# Altium PCB BasicSAMD21.PcbDoc
Units mm, origin at the board's own origin, x right, y up, seen from the top; angles counter-clockwise.
Board outline 39.5 x 45 mm, 2 copper layers (Top Layer, Bottom Layer); 35 components, 50 nets, 163 pads, 40 vias.
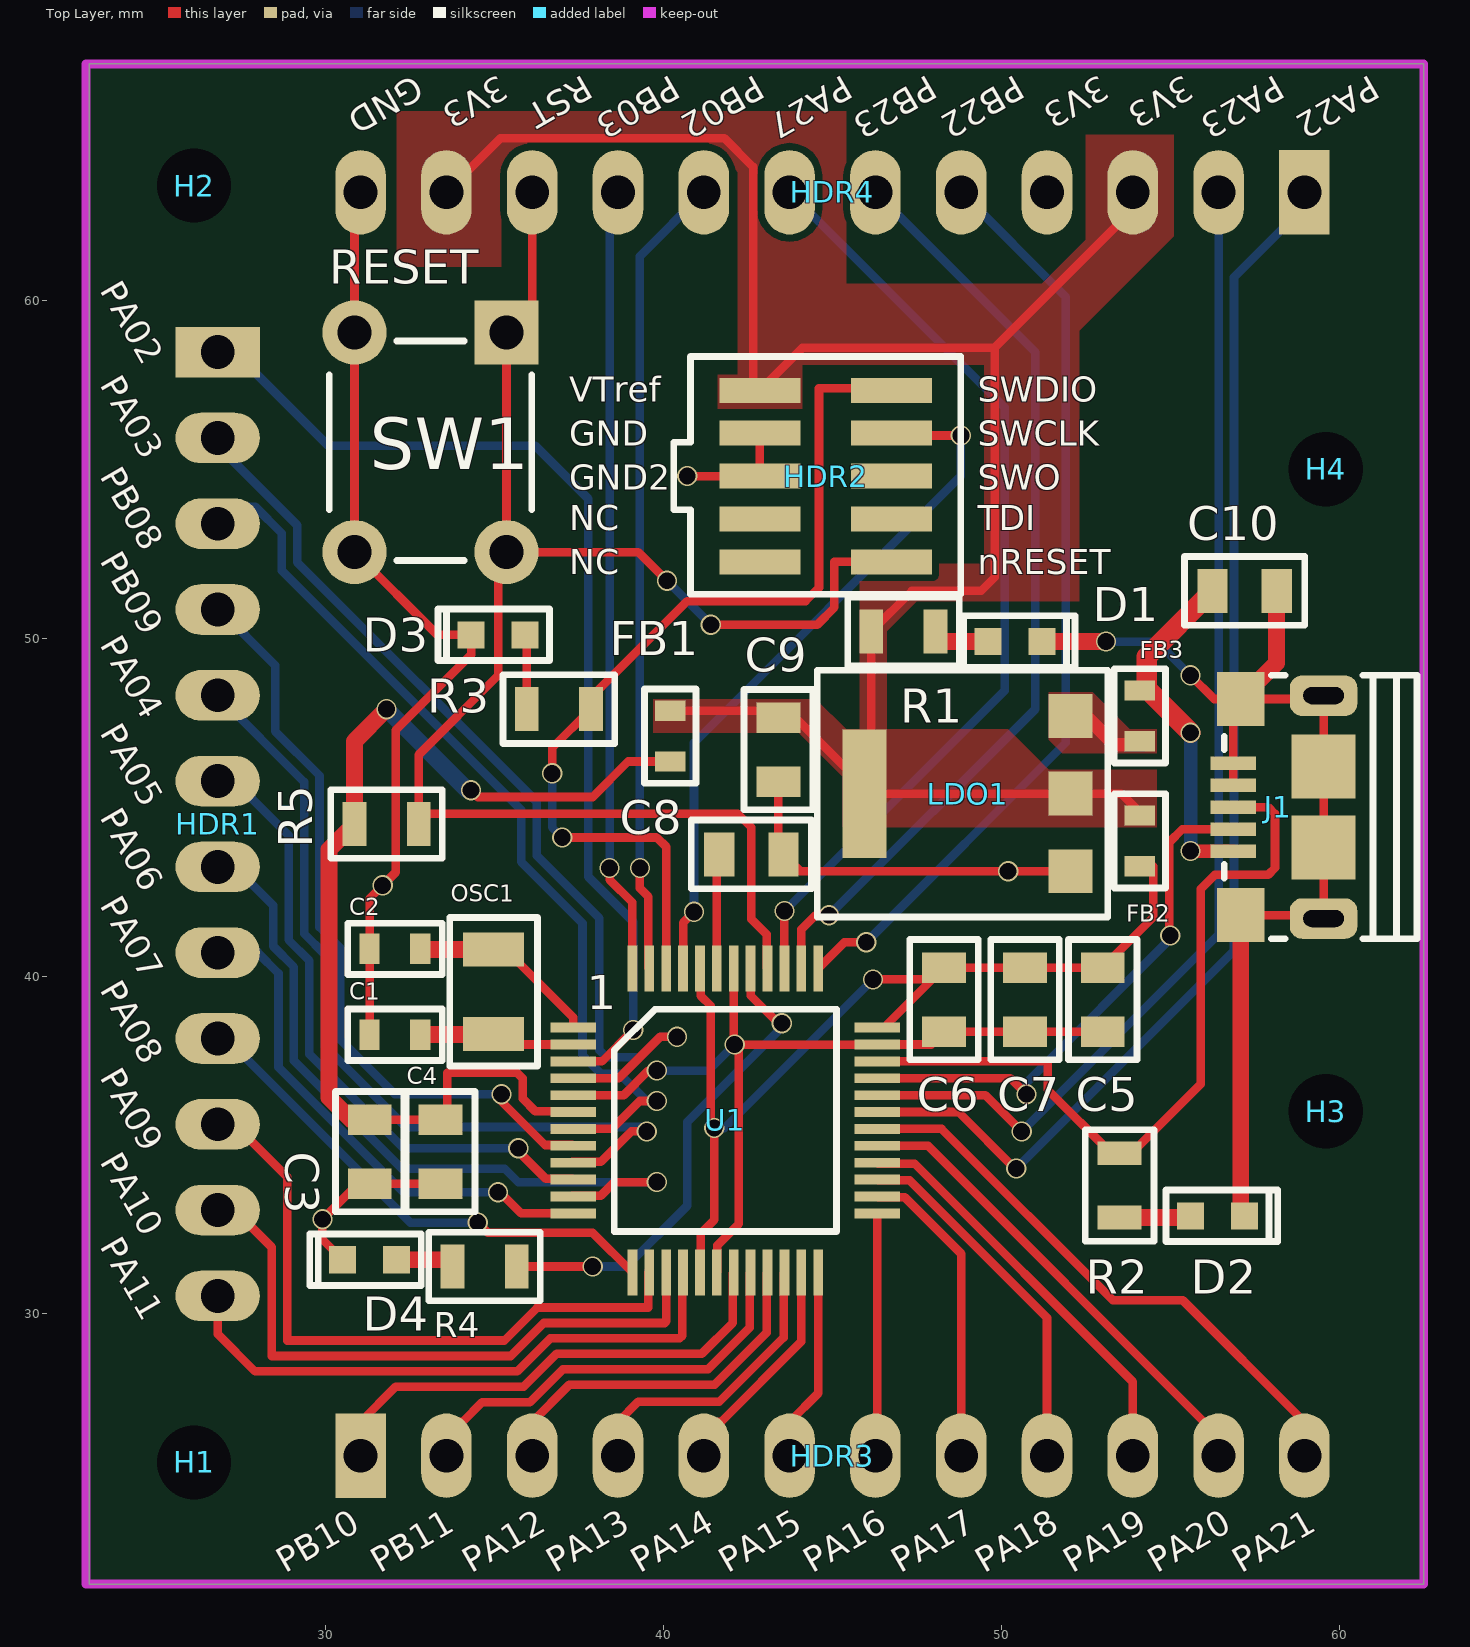
[diagram p0: Top Layer view]
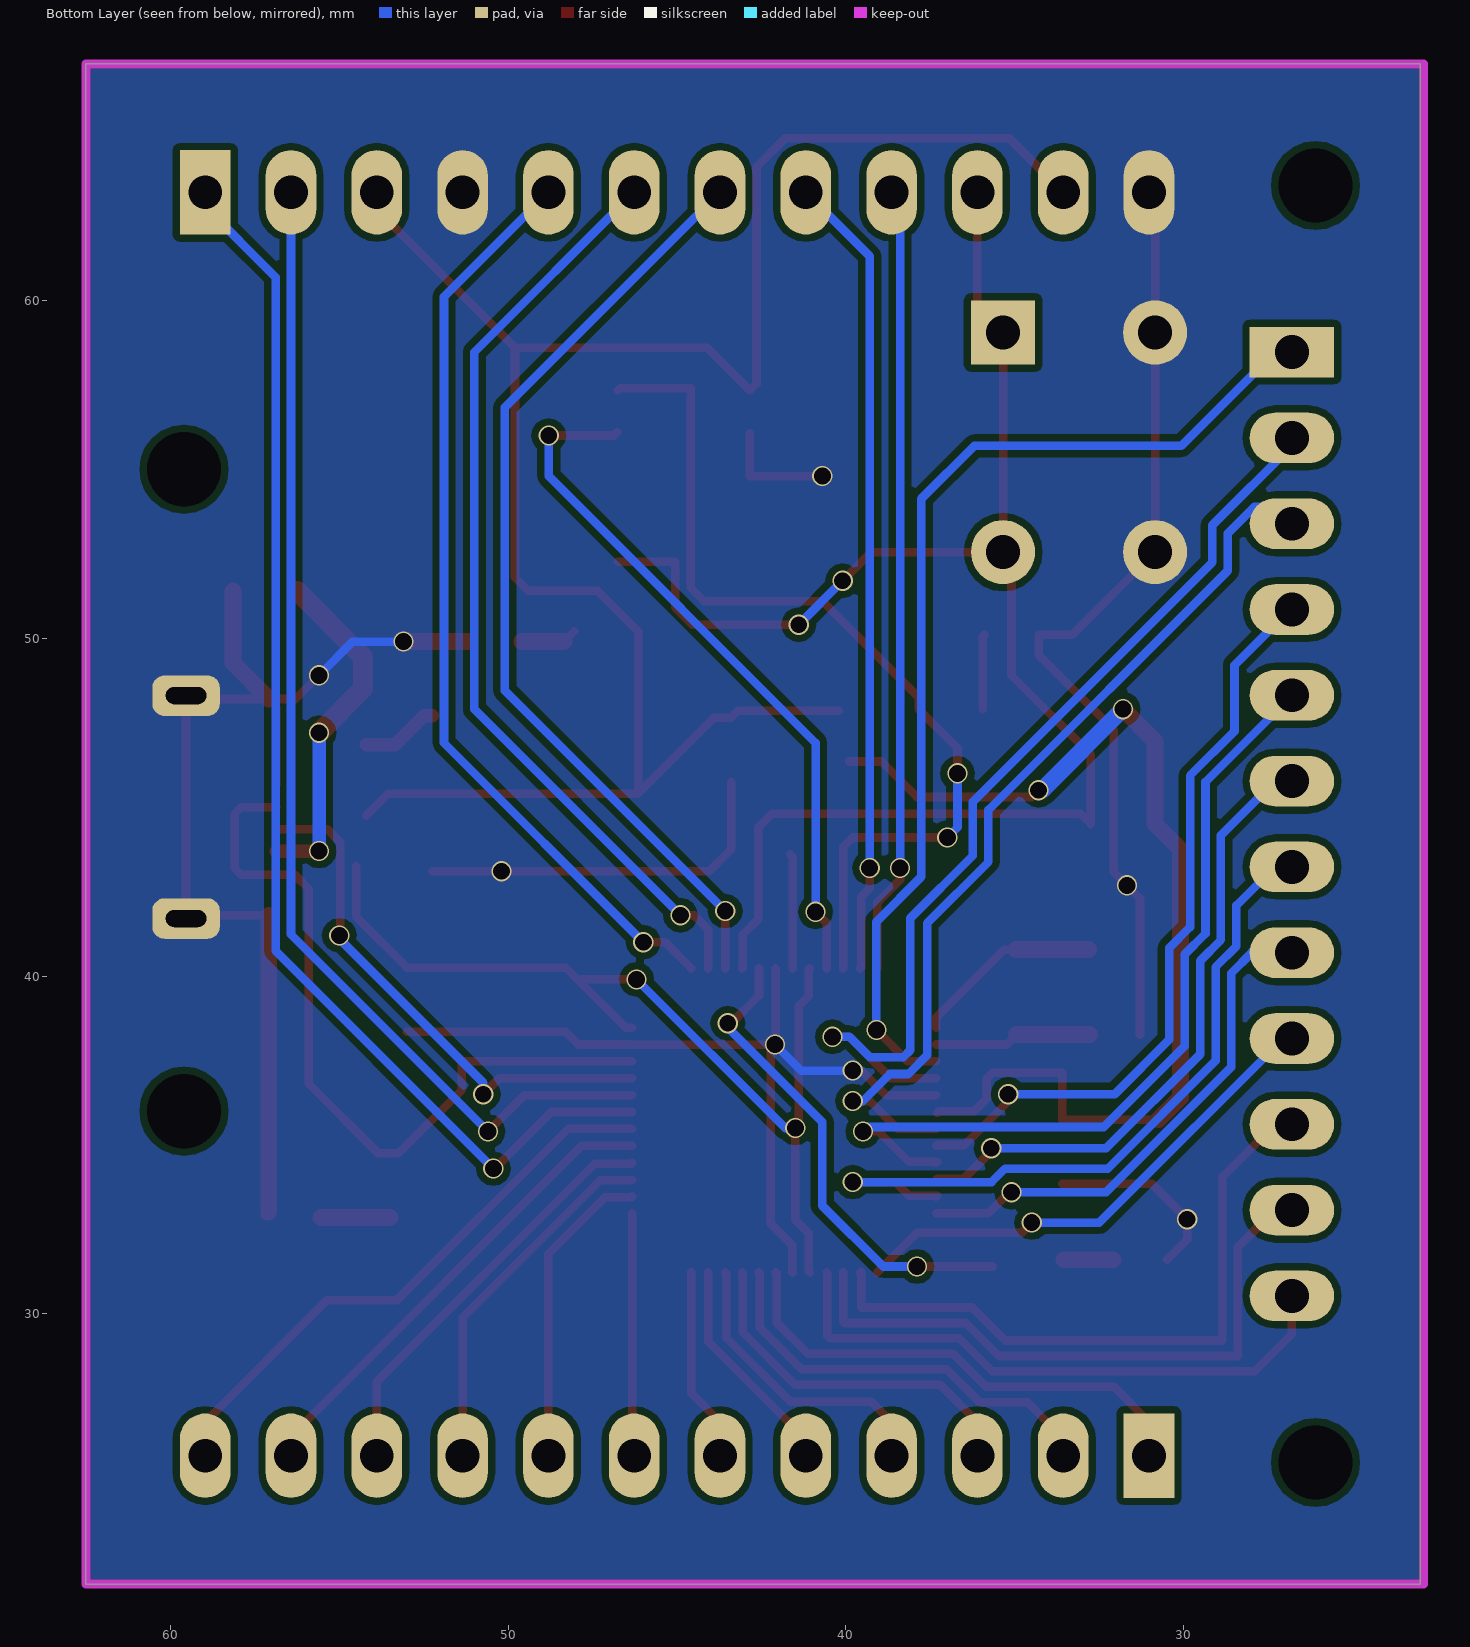
[diagram p1: Bottom Layer view, seen from below]
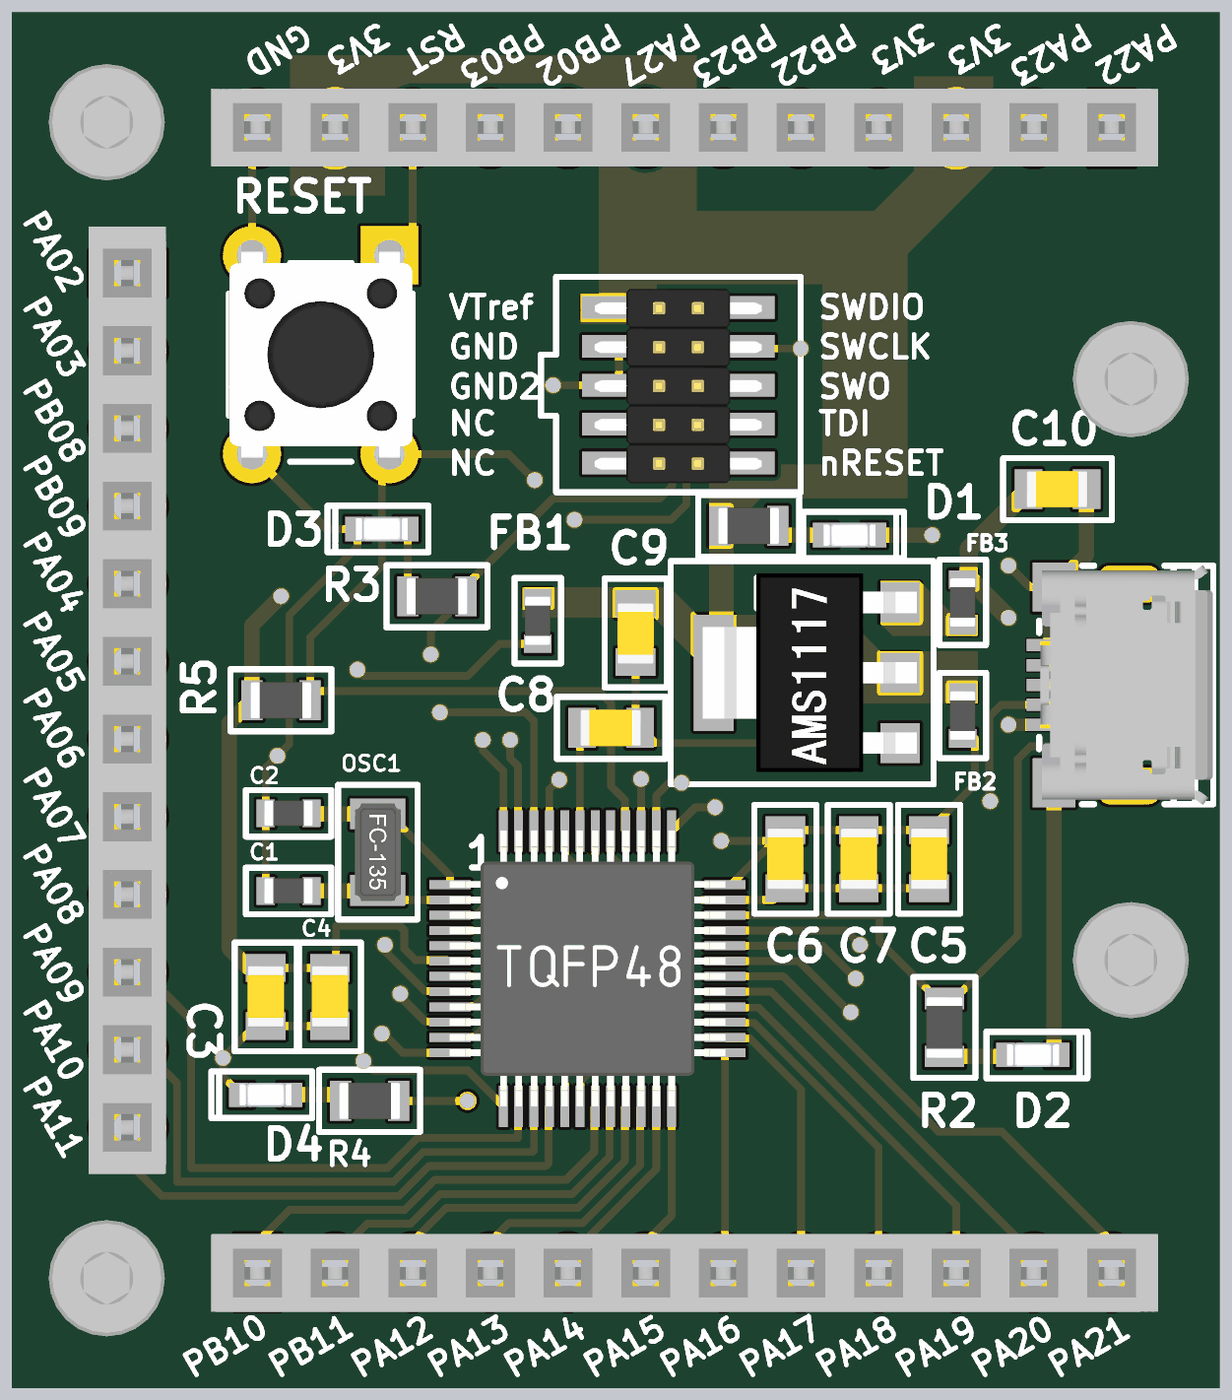
[diagram p2: 3D render of the assembled board from above, using the file's embedded part models]

## Layer stack, top to bottom
Top Solder: solder mask 0.0102, Solder Resist, Dk 3.5
Top Layer: signal copper 0.0356
Dielectric 1: dielectric 0.32, FR-4, Dk 4.8
Bottom Layer: signal copper 0.0356
Bottom Solder: solder mask 0.0102, Solder Resist, Dk 3.5

## Board outline
23,22 62.5,22 62.5,67 23,67

## Design rules (kind name [scope] priority, off if disabled: settings)
Clearance [Not (OnLayer('Keep-Out Layer')) vs Not (OnLayer('Keep-Out Layer'))] p1: gap=0.203 ignorepadtopadclearanceinfootprint=TRUE
PolygonConnect [All] p1: connectstyle=Direct reliefconductorwidth=0.254 reliefentries=4 polygonreliefangle="90 Angle" airgapwidth=0.254
RoutingVias [All] p1: holewidth=0.6 width=0.5 viastyle="Through Hole" minholewidth=0.5 minwidth=0.5 maxholewidth=1 maxwidth=1.27
SolderMaskExpansion [All] p1: expansion=0.102
Width [All] p1: maxlimit=1 minlimit=0.1 preferedwidth=0.2
30 further rules are at their usual default settings.

## Components (designator, comment, footprint, x,y, rotation, side; value= is the part's Value field where it differs from the comment)
C1 "15pF_0603" C0603 32.047,38.263 r180 top
C2 "15pF_0603" C0603 32.047,40.803 r180 top
C3 "10uF/16V" C0805 31.3,34.8 r90 top
C4 "100nF" C0805 33.4,34.8 r90 top
C5 "100nF" C0805 53,39.3 r90 top
C6 "10uF/16V" C0805 48.3,39.3 r90 top
C7 "100nF" C0805 50.7,39.3 r90 top
C8 "1uF/25V" C0805 42.6,43.6 r180 top
C9 "10uF/16V" C0805 43.4,46.7 r270 top
C10 "10uF/16V" C0805 57.2,51.4 r180 top
D1 "Orange" LED_0603 50.4,49.9 r180 top
D2 "Orange" LED_0603 56.4,32.9 r180 top
D3 "Orange" LED_0603 35.1,50.1 r0 top
D4 "Orange" LED_0603 31.3,31.6 r0 top
FB1 "FerriteBead0R800mA_0603" C0603 40.2,47.1 r270 top
FB2 "FerriteBead0R800mA_0603" C0603 54.1,44 r270 top
FB3 "FerriteBead0R800mA_0603" C0603 54.1,47.7 r270 top
H1 "M2Hole" M2Hole 26.1,25.6 r0 top
H2 "M2Hole" M2Hole 26.1,63.4 r0 top
H3 "M2Hole" M2Hole 59.6,36 r0 top
H4 "M2Hole" M2Hole 59.6,55 r0 top
HDR1 "2.54HDR_12POS" DIP12 26.8,44.5 r0 top
HDR2 "JTAG10Pin" JTAG10 44.8,54.8 r0 top
HDR3 "2.54HDR_12POS" DIP12 45,25.8 r90 top
HDR4 "2.54HDR_12POS" DIP12 45,63.2 r270 top
J1 "10118193-0001LF" 10118193 58.2,45 r90 top
LDO1 "LDO_AMS11173.3_SOT-223" SOT223 49,45.4 r90 top
OSC1 "FC-135_32KHZ" FC-135 34.968,39.533 r270 top
R1 "1k R" R0805 47.1,50.2 r0 top
R2 "1k R" R0805 53.5,33.8 r270 top
R3 "1k R" R0805 36.9,47.9 r180 top
R4 "1k R" R0805 34.7,31.4 r180 top
R5 "1k R" R0805 31.8,44.5 r0 top
SW1 "1825910-6" 1825910-6 33.1,55.8 r0 top
U1 "ATSAMD21G18" TQFP48 41.826,35.723 r0 top

## Footprints (in the part's own frame and the unit in brackets; to place one, negate y for a bottom-side part, rotate by r counter-clockwise, add the part's x,y. Pads: shape width x height; smd on the part's side, far side on the other; paste and mask are expansions set on the pad)
1825910-6 [mm]
  rect 1.9x1.9 hole 1: 1(2.25,3.25)
  round 1.9 hole 1: 2(2.25,-3.25) 3(-2.25,3.25) 4(-2.25,-3.25)
  silkscreen extent -3,-3.5 3,3, body extent -3,-3.9 2.99,3.9, height 5
10118193 [mm]
  rect 0.4x1.35 smd mask+0.05: 1(-1.3,1.338) 2(-0.65,1.338) 3(0,1.338) 4(0.65,1.338) 5(1.3,1.338)
  rect 1.6x1.4 smd: 6(-3.2,1.112) 7(3.2,1.112)
  rrect60% 1.2x2 hole 0.5 slot 1.2 at 90 deg: 8(-3.3,-1.338) 9(3.3,-1.338)
  rect 1.9x1.9 smd: 10(-1.2,-1.338) 11(1.2,-1.338)
  silkscreen extent -3.9,-4.1 3.9,1.6, body extent -3.93,-4.1 3.93,1.56, height 2.81
C0603 [mm]
  rect 0.6x0.9 smd: 1(-0.75,0) 2(0.75,0)
  silkscreen extent -1.4,-0.76 1.4,0.76, body extent -0.8,-0.43 0.8,0.42, height 0.81
C0805 [mm]
  rect 0.9x1.3 smd: 1(-0.95,0) 2(0.95,0)
  silkscreen extent -1.78,-1.02 1.78,1.02, body extent -0.98,-0.6 1.02,0.6, height 0.96
DIP12 [mm]
  rect 2.5x1.5 hole 1: 1(0,13.97)
  oval 2.5x1.5 hole 1: 2(0,11.43) 3(0,8.89) 4(0,6.35) 5(0,3.81) 6(0,1.27) 7(0,-1.27) 8(0,-3.81) 9(0,-6.35) 10(0,-8.89) 11(0,-11.43) 12(0,-13.97)
  body extent -1.3,-15.49 1.24,15.49, height 8.51
FC-135 [mm]
  rect 1x1.8 smd: 1(-1.25,0) 2(1.25,0)
  silkscreen extent -2.2,-1.3 2.2,1.3, body extent -1.6,-0.75 1.6,0.75, height 0.8
JTAG10 [mm]
  rect 2.4x0.74 smd: 1(-1.95,2.54) 2(-1.95,1.27) 3(-1.95,0) 4(-1.95,-1.27) 5(-1.95,-2.54) 6(1.95,-2.54) 7(1.95,-1.27) 8(1.95,0) 9(1.95,1.27) 10(1.95,2.54)
  silkscreen extent -4.5,-3.5 4,3.54, body extent -2.75,-3.2 2.75,3.15, height 4.69
LED_0603 [mm]
  rect 0.8x0.8 smd: 1(-0.8,0) 2(0.8,0)
  silkscreen extent -1.78,-0.76 1.52,0.76, body extent -0.85,-0.4 0.85,0.4, height 0.66
M2Hole [mil]
  round 60 hole 86.61 unplated: ""(0,0)
  body extent -75,-75 75,75, height 79
R0805 [mm]
  rect 0.7x1.3 smd: 1(-0.95,0) 2(0.95,0)
  silkscreen extent -1.65,-1.02 1.65,1.02, body extent -1,-0.6 1,0.6, height 0.71
SOT223 [mm]
  rect 1.3x1.3 smd: 1(-2.3,-3.05) 2(0,-3.05) 3(2.3,-3.05)
  rect 3.8x1.3 smd: 2(0,3.05)
  silkscreen extent -3.65,-4.15 3.65,4.45, body extent -3.25,-3.6 3.25,3.4, height 1.87
TQFP48 [mm]
  rect 1.35x0.29 smd: 1(-4.5,2.75) 2(-4.5,2.25) 3(-4.5,1.75) 4(-4.5,1.25) 5(-4.5,0.75) 6(-4.5,0.25) 7(-4.5,-0.25) 8(-4.5,-0.75) 9(-4.5,-1.25) 10(-4.5,-1.75) 11(-4.5,-2.25) 12(-4.5,-2.75) 25(4.5,-2.75) 26(4.5,-2.25) 27(4.5,-1.75) 28(4.5,-1.25) 29(4.5,-0.75) 30(4.5,-0.25) 31(4.5,0.25) 32(4.5,0.75) 33(4.5,1.25) 34(4.5,1.75) 35(4.5,2.25) 36(4.5,2.75)
  rect 0.29x1.35 smd: 13(-2.75,-4.5) 14(-2.25,-4.5) 15(-1.75,-4.5) 16(-1.25,-4.5) 17(-0.75,-4.5) 18(-0.25,-4.5) 19(0.25,-4.5) 20(0.75,-4.5) 21(1.25,-4.5) 22(1.75,-4.5) 23(2.25,-4.5) 24(2.75,-4.5) 37(2.75,4.5) 38(2.25,4.5) 39(1.75,4.5) 40(1.25,4.5) 41(0.75,4.5) 42(0.25,4.5) 43(-0.25,4.5) 44(-0.75,4.5) 45(-1.25,4.5) 46(-1.75,4.5) 47(-2.25,4.5) 48(-2.75,4.5)
  silkscreen extent -3.29,-3.29 3.29,3.29, body extent -4.51,-4.51 4.51,4.51, height 1.1

## Part data
C3 C6 C9 C10: library part C2012X5R1C106M125AC, "CAP CER 10UF 16V X5R 0805", Manufacturer="TDK Corporation", Operating Temperature="-55°C ~ 85°C", Package / Case="0805 (2012 Metric)", Ratings=-, Supplier Part Number 1=445-4115-1-ND, Temperature Coefficient=X5R, Tolerance=±20%, Voltage - Rated=16V, Applications="General Purpose", Category=Capacitors, ComponentLink1Description=https://product.tdk.com/info/en/catalog/datasheets/mlcc_commercial_general_en.pdf, ComponentLink1URL=https://product.tdk.com/info/en/catalog/datasheets/mlcc_commercial_general_en.pdf, Failure Rate=-, Features="Low ESL", Height - Seated (Max)=-, Lead Spacing=-, Lead Style=-, Manufacturer Part Number=C2012X5R1C106M125AC, Mounting Type="Surface Mount, MLCC", Packaging="Cut Tape (CT)", Part Status=Obsolete, Pricing 1="1=0 (USD)", RoHS="RoHS Compliant", Size / Dimension="0.079\" L x 0.049\" W (2.00mm x 1.25mm)", Stock 1=0, Supplier 1=Digi-Key, Thickness (Max)="0.057\" (1.45mm)"
C4 C5 C7: library part C2012X7R1H104K085AA, "CAP CER 0.1UF 50V X7R 0805", Manufacturer="TDK Corporation", Operating Temperature="-55°C ~ 125°C", Package / Case="0805 (2012 Metric)", Ratings=-, Supplier Part Number 1=445-7534-1-ND, Temperature Coefficient=X7R, Tolerance=±10%, Voltage - Rated=50V, Applications="General Purpose", Category=Capacitors, ComponentLink1Description=https://product.tdk.com/info/en/catalog/datasheets/mlcc_commercial_general_en.pdf, ComponentLink1URL=https://product.tdk.com/info/en/catalog/datasheets/mlcc_commercial_general_en.pdf, Failure Rate=-, Features="Low ESL", Height - Seated (Max)=-, Lead Spacing=-, Lead Style=-, Manufacturer Part Number=C2012X7R1H104K085AA, Mounting Type="Surface Mount, MLCC", Notification="Current market demand for these product types have resulted in fluctuating and extending lead times. Lead times may differ.", Packaging="Cut Tape (CT)", Part Status="Not For New Designs", Pricing 1="1=0.12, 10=0.082, 100=0.0385, 500=0.027, 1000=0.02236 (USD)", RoHS="RoHS Compliant", Size / Dimension="0.079\" L x 0.049\" W (2.00mm x 1.25mm)", Stock 1=101021, Supplier 1=Digi-Key, Thickness (Max)="0.037\" (0.95mm)"
C8: library part C2012X5R1E105K125AA, "CAP CER 1UF 25V X5R 0805", Manufacturer="TDK Corporation", Operating Temperature="-55°C ~ 85°C", Package / Case="0805 (2012 Metric)", Ratings=-, Supplier Part Number 1=445-1419-1-ND, Temperature Coefficient=X5R, Tolerance=±10%, Voltage - Rated=25V, Applications="General Purpose", Category=Capacitors, ComponentLink1Description=https://product.tdk.com/info/en/catalog/datasheets/mlcc_commercial_general_en.pdf, ComponentLink1URL=https://product.tdk.com/info/en/catalog/datasheets/mlcc_commercial_general_en.pdf, Failure Rate=-, Features="Low ESL", Height - Seated (Max)=-, Lead Spacing=-, Lead Style=-, Manufacturer Part Number=C2012X5R1E105K125AA, Mounting Type="Surface Mount, MLCC", Notification="Current market demand for these product types have resulted in fluctuating and extending lead times. Lead times may differ.", Packaging="Cut Tape (CT)", Part Status="Not For New Designs", Pricing 1="1=0.18, 10=0.129, 100=0.0605, 500=0.04244, 1000=0.03514 (USD)", RoHS="RoHS Compliant", Size / Dimension="0.079\" L x 0.049\" W (2.00mm x 1.25mm)", Stock 1=774565, Supplier 1=Digi-Key, Thickness (Max)="0.057\" (1.45mm)"
D1 D2 D3 D4: library part "LO L29K-H2K1-24-Z", "LED ORANGE DIFFUSED 0603 SMD", Current - Test=2mA, Lens Color=White, Manufacturer="OSRAM Opto Semiconductors Inc.", Millicandela Rating=6.3mcd, Package / Case="0603 (1608 Metric)", Supplier Device Package=0603, Supplier Part Number 1=475-2740-1-ND, Voltage - Forward (Vf) (Typ)=1.8V, Category=Optoelectronics, Color=Orange, ComponentLink1Description=https://dammedia.osram.info/media/resource/hires/osram-dam-2493882/LO%20L29K.pdf, ComponentLink1URL=https://dammedia.osram.info/media/resource/hires/osram-dam-2493882/LO%20L29K.pdf, Features=-, Height (Max)=0.65mm, Lens Style/Size="Rectangle with Flat Top, 1.30mm x 0.80mm", Lens Transparency=Diffused, Manufacturer Part Number="LO L29K-H2K1-24-Z", Mounting Type="Surface Mount", Packaging="Cut Tape (CT)", Part Status=Active, Pricing 1="1=0.51, 10=0.359, 25=0.3116, 100=0.2396, 250=0.19468, 500=0.14376, 1000=0.1198, 2500=0.10782 (USD)", RoHS="RoHS Compliant", Size / Dimension="1.70mm L x 0.80mm W", Stock 1=8500, Supplier 1=Digi-Key, Viewing Angle=160°, Wavelength - Dominant=606nm, Wavelength - Peak=610nm
HDR2: library part JTAG_10Pin
J1: "CONN USB MICRO B RECPT SMT R/A", Current Rating="1.8A per Contact", Insulation Color=Black, Manufacturer="Amphenol FCI", Material Flammability Rating="UL94 V-0", Operating Temperature="-30°C ~ 80°C", Supplier Part Number 1=609-4616-1-ND, Voltage - Rated=100VAC, Category="Connectors, Interconnects", ComponentLink1Description=http://cdn.amphenol-icc.com/media/wysiwyg/files/drawing/10118193.pdf, ComponentLink1URL=http://cdn.amphenol-icc.com/media/wysiwyg/files/drawing/10118193.pdf, Connector Type="USB - micro B", Contact Finish=Gold, Features="Solder Retention", Gender=Receptacle, Ingress Protection=-, Manufacturer Part Number=10118193-0001LF, Mating Cycles=10000, Mounting Feature=Horizontal, Mounting Type="Surface Mount, Right Angle; Through Hole", Number of Contacts=5, Packaging="Cut Tape (CT)", Part Status=Active, Pricing 1="1=0.46, 10=0.437, 25=0.3744, 50=0.318, 100=0.3056, 250=0.27444, 500=0.26196 (USD)", RoHS="RoHS Compliant", Shell/Shielding Material="Steel, Stainless", Shielding=Shielded, Specifications="USB 2.0", Stock 1=104127, Supplier 1=Digi-Key, Termination=Solder
OSC1: library part FC-135R32.7680KA-A3, "32.768kHz ±20ppm Crystal 12.5pF 50 kOhm -40°C ~ 85°C  Surface Mount 2-SMD, No Lead (DFN, LCC)", ESR (Equivalent Series Resistance)="50 kOhm", Frequency=32.768kHz, Frequency Stability=-, Frequency Tolerance=±20ppm, Load Capacitance=12.5pF, Manufacturer=Epson, Operating Mode=Fundamental, Operating Temperature="-40°C ~ 85°C", Package / Case="2-SMD, No Lead (DFN, LCC)", Category="Crystals and Oscillators", Family=Crystals, Height="0.035\" (0.90mm)", Manufacturer Part Number=FC-135R32.7680KA-A3, Mounting Type="Surface Mount", Packaging="Cut Tape (CT)", Pricing 1="1=0.59, 10=0.495, 50=0.4456, 100=0.396 (USD)", Ratings=-, Series=FC-135R, Size / Dimension="0.126\" L x 0.061\" W (3.20mm x 1.50mm)", Stock 1=2024, Supplier 1=Digi-Key, Type="kHz Crystal (Tuning Fork)"
R1 R2 R3 R4 R5: library part RC0805FR-071KL, "RES SMD 1K OHM 1% 1/8W 0805", Manufacturer=Yageo, Operating Temperature="-55°C ~ 155°C", Package / Case="0805 (2012 Metric)", Power (Watts)="0.125W, 1/8W", Supplier Device Package=0805, Supplier Part Number 1=311-1.00KCRCT-ND, Temperature Coefficient=±100ppm/°C, Tolerance=±1%, Category=Resistors, ComponentLink1Description=http://www.yageo.com/documents/recent/PYu-RC_Group_51_RoHS_L_8.pdf, ComponentLink1URL=http://www.yageo.com/documents/recent/PYu-RC_Group_51_RoHS_L_8.pdf, Composition="Thick Film", Failure Rate=-, Features="Moisture Resistant", Height - Seated (Max)="0.024\" (0.60mm)", Manufacturer Part Number=RC0805FR-071KL, Packaging="Cut Tape (CT)", Part Status=Active, Pricing 1="1=0.1, 10=0.022, 100=0.0088, 1000=0.00396, 2500=0.00344 (USD)", RoHS="RoHS Compliant", Size / Dimension="0.079\" L x 0.049\" W (2.00mm x 1.25mm)", Stock 1=8527092, Supplier 1=Digi-Key
SW1: "SWITCH TACTILE SPST-NO 0.05A 24V", Contact Rating @ Voltage="0.05A @ 24VDC", Illumination Type, Color=-, Manufacturer="TE Connectivity ALCOSWITCH Switches", Operating Force=160gf, Operating Temperature="-35°C ~ 85°C", Supplier Part Number 1=450-1650-ND, Actuator Height off PCB, Vertical=5.00mm, Actuator Length, Right Angle=-, Actuator Material="Polybutylene Terephthalate (PBT)", Actuator Orientation="Top Actuated", Actuator Type=Standard, Category=Switches, Circuit=SPST-NO, ComponentLink1Description=http://www.te.com/commerce/DocumentDelivery/DDEController?Action=srchrtrv&DocNm=1825910&DocType=Customer+Drawing&DocLang=English, ComponentLink1URL=http://www.te.com/commerce/DocumentDelivery/DDEController?Action=srchrtrv&DocNm=1825910&DocType=Customer+Drawing&DocLang=English, Features=-, Illumination=Non-Illuminated, Illumination Voltage (Nominal)=-, Ingress Protection=-, Manufacturer Part Number=1825910-6, Mechanical Life="100,000 Cycles", Mounting Type="Through Hole", Outline="6.00mm x 6.00mm", Packaging=Bulk, Part Status=Active, Pricing 1="1=0.1, 10=0.091, 25=0.0876, 50=0.0844, 100=0.0798, 250=0.07508, 500=0.07196, 1000=0.05475, 5000=0.04536 (USD)", RoHS="RoHS Compliant", Stock 1=88203, Supplier 1=Digi-Key, Switch Function=Off-Mom, Switch Travel=0.25mm, Termination Style="PC Pin"
U1: library part ATSAMD21G18A-AUT, "IC MCU 32BIT 256KB FLASH 48TQFP", Manufacturer=Microchip, Manufacturer Part Number=ATSAMD21G18A-AUT, Pricing 1="1=3.22, 25=2.9252, 100=2.6574 (USD)", Stock 1=16813, Supplier 1=Digi-Key

## Via types
v1: diameter 0.6, hole 0.5, Top Layer to Bottom Layer, 40 vias

## Nets (pads, with @x,y where several pads share a name; then routed paths per layer and width w, separated by ;. In a path a pad name is that pad's centre, name@x,y a point inside that pad or via, vN(x,y) a via of type N, cw(c..) or ccw(c..) an arc to the next point about the centre after c; other vN are vias at no path point)
GND: C1.2 C2.2 C3.1 C4.1 C5.1 C6.1 C7.1 C8.1 C9.2 C10.1 D1.1 D2.1 D3.1 D4.1 HDR2.2 HDR2.3 HDR4.4 HDR4.12 J1.4 J1.5 J1.6 J1.7 J1.8 J1.9 J1.10 J1.11 LDO1.1 SW1.3 SW1.4 U1.5 U1.18 U1.35 U1.42 | length 107.4
  Top Layer w0.254: v1(29.9,32.8) 30.95,33.85 C3.1 C4.1@33.6,33.85 ; v1@30.05,32.75 29.9,32.6 29.9,32.2 D4.1 ; HDR4.12 30.85,63.02 SW1.3 SW1.4 33.3,50.1 D3.1 34.3,49.509 32.07,47.279 32.07,43.07 31.297,42.297 C2.2 C1.2 ; U1.5 38.82,36.473 39.547,37.2 v1(39.8,37.2) ; v1(40.7,54.8) HDR2.3 HDR2.2 ; U1.18 41.594,31.241 41.594,32.028 42.23,32.664 42.23,37.846 v1(42.103,37.973) ; U1.42 42.076,38 v1(42.103,37.973) ; C9.2 43.4,43.75 C8.1 44.05,43.1 LDO1.1@52.25,43.1 ; C5.1 C7.1 C6.1 47.923,37.973 U1.35 46.323,37.97 42.106,37.97 v1(42.103,37.973) ; v1(55.6,48.9) 56.3,48.2 J1.7 ; J1.4 J1.5 56.862,47.975 J1.7 ; D2.1@57.088,33.012 D2.1 ; J1.6 59.437,41.8 59.538,41.9 J1.10 J1.11 J1.9 59.438,48.2 J1.7
  Top Layer w0.5: D1.1 v1(53.1,49.9) ; D2.1@57.088,33.012 J1.6 ; J1.7 58.15,49.262 C10.1
  Bottom Layer w0.254: v1(39.8,37.2) 41.33,37.2 v1(42.103,37.973) ; v1(53.1,49.9) 54.6,49.9 v1(55.6,48.9)
  other v1: 31.683,42.683 50.2,43.1
NetC1_1: C1.1 OSC1.2 U1.2 | length 4.6
  Top Layer w0.254: OSC1.2@34.948,38.263 35.238,37.973 U1.2
  Top Layer w0.5: C1.1 OSC1.2@34.948,38.263
NetC2_1: C2.1 OSC1.1 U1.1 | length 5.6
  Top Layer w0.254: OSC1.1 35.317,40.783 37.326,38.774 U1.1
  Top Layer w0.5: C2.1@32.817,40.783 OSC1.1
NetC10_2: C10.2 FB3.1 J1.1 | length 10.4
  Top Layer w0.4: v1(55.6,43.7) J1.1
  Top Layer w0.6: v1(55.6,47.2) 54.3,48.5 54.3,49.45 C10.2
  Bottom Layer w0.254: v1(55.6,43.7) 55.7,43.8 v1@55.6,43.9
  Bottom Layer w0.4: v1@55.6,43.9 v1(55.6,47.2)
NetD1_2: D1.2 R1.2 | length 1.7
  Top Layer w0.254: R1.2 R1.2@48.35,49.9
  Top Layer w0.5: R1.2@48.35,49.9 D1.2
NetD2_2: D2.2 R2.2 | length 2
  Top Layer w0.5: R2.2 D2.2@55.55,32.85
NetD3_2: D3.2 R3.2 | length 2.2
  Top Layer w0.254: D3.2 35.95,50.05 R3.2
NetD4_2: D4.2 R4.2 | length 1.4
  Top Layer w0.5: D4.2 R4.2@33.55,31.6
NetFB3_2: FB3.2 LDO1.3 | length 2.3
  Top Layer w0.4: LDO1.3@52.25,47.7 52.5,47.7 53.35,46.85 FB3.2@54.2,46.85
NetHDR2_9: HDR2.9 U1.45 | length 21.2
  Top Layer w0.254: U1.45 40.576,41.576 v1(40.9,41.9) ; HDR2.9@46.78,56.1 46.88,56 v1(48.8,56)
  Bottom Layer w0.254: v1(40.9,41.9) 40.9,46.9 48.8,54.8 v1(48.8,56)
PA02: HDR1.1 U1.3 | length 31.4
  Top Layer w0.254: U1.3 38.173,37.473 v1(39.1,38.4)
  Bottom Layer w0.254: HDR1.1@26.8,58.97 30.07,55.7 36.2,55.7 37.77,54.13 37.77,42.939 39.1,41.609 v1(39.1,38.4)
PA03: HDR1.2 U1.4 | length 29.5
  Top Layer w0.254: U1.4 38.673,36.973 39.9,38.2 v1(40.4,38.2)
  Bottom Layer w0.254: HDR1.2@26.8,56.43 26.8,55.7 29.157,53.343 29.157,52.243 36.243,45.157 36.243,43.566 38.1,41.709 38.1,37.8 38.3,37.6 39.3,37.6 39.9,38.2 v1(40.4,38.2)
PA04: HDR1.5 U1.9 | length 25.4
  Top Layer w0.254: U1.9 37.301,34.498 38.138,34.498 39.04,35.4 v1(39.5,35.4)
  Bottom Layer w0.254: HDR1.5@26.8,48.81 26.8,48.3 29.357,45.743 29.357,41.258 29.972,40.643 29.972,37.928 32.37,35.53 39.47,35.53 39.5,35.5 v1(39.5,35.4)
PA05: HDR1.6 U1.10 | length 19.1
  Top Layer w0.254: v1(35.7,34.9) 35.7,34.812 36.514,33.998 37.301,33.998 U1.10
  Bottom Layer w0.254: HDR1.6@26.8,46.27 28.9,44.17 28.9,41.068 29.514,40.454 29.514,37.686 32.3,34.9 v1(35.7,34.9)
PA06: HDR1.7 U1.11 | length 22.1
  Top Layer w0.254: U1.11 37.301,33.498 38.138,33.498 38.54,33.9 v1(39.8,33.9)
  Bottom Layer w0.254: HDR1.7@26.8,43.73 28.443,42.087 28.443,40.879 29.057,40.264 29.057,37.489 32.247,34.3 35.291,34.3 35.691,33.9 v1(39.8,33.9)
PA07: HDR1.8 U1.12 | length 15.6
  Top Layer w0.254: v1(35.1,33.6) 35.16,33.6 35.787,32.973 U1.12
  Bottom Layer w0.254: HDR1.8@26.8,41.19 27.51,41.19 27.986,40.714 27.986,40.689 28.6,40.075 28.6,37.3 32.3,33.6 v1(35.1,33.6)
PA08: HDR1.9 U1.13 | length 15.6
  Top Layer w0.254: v1@34.5,32.55 v1(34.5,32.7) 34.8,32.4 37.899,32.4 U1.13
  Bottom Layer w0.254: HDR1.9@26.8,38.65 26.8,38.4 32.5,32.7 v1(34.5,32.7)
PA09: HDR1.10 U1.14 | length 19.9
  Top Layer w0.254: HDR1.10@26.8,36.11 28.857,34.053 28.857,29.209 35.286,29.209 36.263,30.186 39.539,30.186 39.551,30.199 39.551,31.198 U1.14 U1.14@39.551,31.248
PA10: HDR1.11 U1.15 | length 19
  Top Layer w0.254: HDR1.11@26.8,33.57 28.4,31.97 28.4,28.752 35.475,28.752 36.452,29.729 40.029,29.729 40.076,29.776 U1.15
PA11: HDR1.12 U1.16 | length 18.2
  Top Layer w0.254: HDR1.12@26.8,31.03 26.8,29.4 27.905,28.295 35.665,28.295 36.642,29.272 40.472,29.272 40.551,29.351 40.551,31.198 U1.16
PA12: HDR3.3 U1.21 | length 9.8
  Top Layer w0.254: HDR3.3@36.11,26.8 37.21,27.9 41.507,27.9 43.051,29.444 43.051,31.198 U1.21
PA13: HDR3.4 U1.22 | length 7.9
  Top Layer w0.254: HDR3.4@38.65,26.8 39.25,27.4 41.653,27.4 43.551,29.298 43.551,31.198 U1.22
PA14: HDR3.5 U1.23 | length 5.9
  Top Layer w0.254: HDR3.5@41.19,26.8 41.7,26.8 44.076,29.176 U1.23
PA15: HDR3.6 U1.24 | length 4.8
  Top Layer w0.254: HDR3.6@43.73,26.8 44.576,27.646 U1.24
PA16: HDR3.7 U1.25 | length 6.1
  Top Layer w0.254: HDR3.7@46.326,26.856 U1.25
PA17: HDR3.8 U1.26 | length 8.2
  Top Layer w0.254: U1.26 46.351,33.448 47.138,33.448 48.81,31.776 HDR3.8@48.81,26.8
PA18: HDR3.9 U1.27 | length 9.8
  Top Layer w0.254: U1.27 46.351,33.948 47.284,33.948 51.35,29.883 HDR3.9@51.35,26.8
PA19: HDR3.10 U1.28 | length 11.4
  Top Layer w0.254: U1.28 46.351,34.448 47.431,34.448 53.89,27.989 HDR3.10@53.89,26.8
PA20: HDR3.11 U1.29 | length 13.5
  Top Layer w0.254: U1.29 47.827,34.973 56,26.8 HDR3.11@56.43,26.8
PA21: HDR3.12 U1.30 | length 16.2
  Top Layer w0.254: U1.30 48.227,35.473 53.3,30.4 55.37,30.4 HDR3.12@58.97,26.8
PA22: HDR4.1 U1.31 | length 37.2
  Top Layer w0.254: U1.31 48.727,35.973 v1@50.42,34.28
  Bottom Layer w0.254: v1(50.44,34.3) 56.887,40.747 56.887,44.75 56.887,60.687 58.97,62.77 HDR4.1
PA23: HDR4.2 U1.32 | length 34.9
  Top Layer w0.254: U1.32 49.527,36.473 v1(50.6,35.4)
  Bottom Layer w0.254: v1(50.6,35.4) 56.43,41.23 56.43,44.561 ; 56.43,44.561 HDR4.2
PA27: HDR4.7 U1.39 | length 28.3
  Top Layer w0.254: U1.39 v1(43.576,41.924)
  Bottom Layer w0.254: v1(43.576,41.924) 50.1,48.448 50.1,56.83 HDR4.7
PA28: R4.1 U1.41 | length 14.4
  Top Layer w0.254: R4.1 v1(37.9,31.4) ; U1.41 42.576,39.424 43.4,38.6 v1(43.5,38.6)
  Bottom Layer w0.254: v1(37.9,31.4) 38.9,31.4 40.7,33.2 40.7,35.679 43.5,38.479 v1(43.5,38.6)
PB02: HDR4.8 U1.47 | length 23.9
  Top Layer w0.254: v1(39.3,43.2) 39.3,42.599 39.551,42.347 39.551,40.248 U1.47
  Bottom Layer w0.254: v1(39.3,43.2) 39.3,61.31 HDR4.8
PB03: HDR4.9 U1.48 | length 23.4
  Top Layer w0.254: v1(38.4,43.2) 38.4,42.852 39.076,42.176 U1.48
  Bottom Layer w0.254: v1(38.4,43.2) 38.4,62.95 HDR4.9
PB08: HDR1.3 U1.7 | length 26.9
  Top Layer w0.254: U1.7 38.466,35.473 39.293,36.3 v1(39.8,36.3)
  Bottom Layer w0.254: HDR1.3@26.8,53.89 27.91,53.89 28.7,53.1 28.7,52 35.786,44.914 35.786,43.377 37.6,41.562 37.6,37.653 38.153,37.1 38.7,37.1 39.5,36.3 v1(39.8,36.3)
PB09: HDR1.4 U1.8 | length 23.1
  Top Layer w0.254: v1(35.2,36.5) 35.2,36.491 35.1,36.391 36.493,34.998 37.301,34.998 U1.8
  Bottom Layer w0.254: HDR1.4@26.8,51.35 26.8,50.9 28.5,49.2 28.5,47.247 29.814,45.932 29.814,41.447 30.429,40.833 30.429,38.118 32.047,36.5 v1(35.2,36.5)
PB10: HDR3.1 U1.19 | length 13.7
  Top Layer w0.254: HDR3.1@31.03,26.8 32.067,27.837 35.854,27.837 36.831,28.814 41.128,28.814 42.051,29.738 42.051,31.198 U1.19
PB11: HDR3.2 U1.20 | length 11.8
  Top Layer w0.254: HDR3.2@33.57,26.8 34.047,26.8 34.627,27.38 36.044,27.38 37.021,28.357 41.317,28.357 42.551,29.591 42.551,31.198 U1.20
PB22: HDR4.5 U1.37 | length 27.7
  Top Layer w0.254: U1.37 45.353,41 v1(46,41)
  Bottom Layer w0.254: v1(46,41) 51.9,46.9 51.9,60.11 HDR4.5
PB23: HDR4.6 U1.38 | length 28
  Top Layer w0.254: U1.38 44.076,41.376 44.5,41.8 v1(44.9,41.8)
  Bottom Layer w0.254: v1(44.9,41.8) 51,47.9 51,58.47 HDR4.6
RESET: HDR2.6 HDR4.10 R5.2 SW1.1 SW1.2 U1.40 | length 48.5
  Top Layer w0.254: HDR4.10 36.11,59.81 SW1.1 SW1.2 ; v1(40.1,51.7) 39.25,52.55 SW1.2 ; v1(41.4,50.4) 44.547,50.4 45.057,50.911 45.057,52.26 HDR2.6 ; U1.40 43.051,40.248 43.051,41.228 42.6,41.679 42.6,44.4 42.2,44.8 33.05,44.8 R5.2 32.75,46.55 35.1,48.9 35.1,52.3 SW1.2
  Bottom Layer w0.254: v1(40.1,51.7) v1(41.4,50.4)
SWDIO: HDR2.10 R3.1 U1.46 | length 27.7
  Top Layer w0.254: v1(36.7,46) 36.7,46.75 R3.1 37.85,48.25 40.7,51.1 44.2,51.1 44.6,51.5 44.6,57.4 46.69,57.4 HDR2.10 ; v1(37,44.1) 39.8,44.1 40.076,43.824 U1.46
  Bottom Layer w0.254: v1(36.7,46) 36.7,44.4 v1(37,44.1)
USB_D+: J1.3 R2.1 U1.34 | length 23.2
  Top Layer w0.254: U1.34 51.327,37.473 51.37,37.43 51.37,36.63 53.25,34.75 R2.1 53.85,34.75 55.9,36.8 55.9,42.579 56.321,43 57.9,43 58.1,43.2 58.1,44.8 57.9,45 J1.3
USB_D-: J1.2 U1.33 | length 16.2
  Top Layer w0.254: U1.33 50.267,36.973 v1(50.74,36.5) ; v1(55,41.2) 54.97,41.23 54.97,43.961 55.359,44.35 J1.2
  Bottom Layer w0.254: v1(50.74,36.5) 50.74,36.84 v1@55.15,41.25 ; v1(55,41.2) 55.14,41.2 v1@55.17,41.23
VDDANA: C3.2 C4.2 FB1.2 R5.1 U1.6 | length 31.5
  Top Layer w0.254: C3.2@30.75,35.75 C3.2 33.6,35.75 33.6,37.13 35.67,37.13 35.83,36.97 35.83,36.37 36.202,35.998 37.252,35.998 U1.6@37.301,35.948 ; v1(34.3,45.5) 34.5,45.3 37.9,45.3 38.95,46.35 FB1.2@39.9,46.35
  Top Layer w0.5: C3.2@30.75,35.75 30.1,36.4 30.1,43.75 R5.1 30.85,46.95 v1(31.8,47.9)
  Bottom Layer w0.254: v1@34.2,45.5 v1(34.3,45.5)
  Bottom Layer w0.5: v1(31.8,47.9) v1@34.2,45.5
VDDCORE: C8.2 U1.43 | length 3.4
  Top Layer w0.254: U1.43 41.576,43.526 C8.2
VDDIN: C5.2 C6.2 C7.2 FB2.2 U1.17 U1.36 U1.44 | length 28.7
  Top Layer w0.254: U1.17 41.101,31.248 41.101,32.381 41.5,32.781 v1(41.5,35.5) 41.4,35.6 41.4,39.112 41.101,39.411 41.101,40.198 U1.44 ; v1(46.2,39.9) C6.2@47.95,39.9 ; U1.36 46.523,38.473 C6.2@47.95,39.9 ; FB2.2@54.5,43.25 54.5,41.75 C5.2 C7.2 C6.2 C6.2@47.95,39.9
  Bottom Layer w0.254: v1(41.5,35.5) 41.8,35.5 v1(46.2,39.9)
VOUT: C9.1 FB1.1 FB2.1 HDR2.1 HDR4.3 HDR4.11 LDO1.2 R1.1 | length 61.8
  Top Layer w0.254: HDR4.11 35.17,64.8 41.8,64.8 42.65,63.95 42.65,57.54 HDR2.1 44.11,58.6 49.8,58.6 ; FB1.1 43.2,47.85 C9.1 43.9,47.65 LDO1.2@46.15,45.4 ; HDR4.3 53.89,62.69 49.8,58.6 ; FB2.1@54.2,44.75 53.55,45.4 LDO1.2@46.15,45.4 ; LDO1.2@46.15,45.4 R1.1 47.35,51.4 49.4,51.4 49.8,51.8 49.8,58.6
pads on no net: H1. H2. H3. H4. HDR2.4 HDR2.5 HDR2.7 HDR2.8

## Polygon pours and split planes (outlines as drawn)
VOUT on Top Layer "Top Layer-No Net" (solid, pour order 8): 41.6,56.8 44.1,56.8 44.1,58.1 52,58.1 52,60.5 45.4,60.5 45.4,65.6 32.1,65.6 32.1,61 35.2,61 35.2,63.8 36,64.7 41.3,64.7 42.2,63.8 42.2,57.8 41.6,57.8
VOUT on Top Layer "Top Layer-No Net" (solid, pour order 6): 45.8,46.2 46.6,46.2 46.6,50.2 47.5,51.1 52.3,51.1 52.3,59.1 55.1,61.9 55.1,64.9 52.5,64.9 52.5,61.8 49.5,58.8 49.5,52.2 45.8,52.2
VOUT on Top Layer "Top Layer-No Net" (solid, pour order 2): 39.7,48.2 39.7,47.2 44,47.2 45.3,45.9 45.3,44.4 54.6,44.4 54.6,46.1 51.4,46.1 50.2,47.3 45.4,47.3 44.5,48.2
NetFB3_2 on Top Layer "Top Layer-No Net" (solid, pour order 4): 51.4,48.4 51.4,47 51.8,46.6 54.6,46.6 54.6,47.3 53.8,47.3 52.7,48.4
GND on Bottom Layer "Bottom Layer-No Net" (solid, pour order 0): 23,67 62.5,67 62.5,22 23,22

## Keep-outs
Keep-Out Layer:
  lines w0.254: 22.9,22 62.5,22 62.5,67 22.9,67 22.9,22

## Silkscreen, mask and mechanical layers (free items; w line width, h text height)
Top Overlay:
  text "GND" at 32.6,66.7 h0.75 r210
  text "3V3" at 35.1,66.7 h0.75 r210
  text "RST" at 37.6,66.7 h0.75 r210
  text "PB03" at 40.2,66.7 h0.75 r210
  text "PB02" at 42.7,66.7 h0.75 r210
  text "PA27" at 45.3,66.7 h0.75 r210
  text "PB23" at 47.8,66.7 h0.75 r210
  text "PB22" at 50.4,66.7 h0.75 r210
  text "3V3" at 52.9,66.7 h0.75 r210
  text "3V3" at 55.4,66.7 h0.75 r210
  text "PA23" at 58.1,66.7 h0.75 r210
  text "PA22" at 60.9,66.7 h0.75 r210
  text "RESET" at 30.1,60.5 h1
  text "PA02" at 23.3,60.3 h0.75 r300
  text "PA03" at 23.3,57.5 h0.75 r300
  text "PB08" at 23.3,54.8 h0.75 r300
  text "PB09" at 23.3,52.3 h0.75 r300
  text "PA04" at 23.3,49.8 h0.75 r300
  text "PA05" at 23.3,47.2 h0.75 r300
  text "PA06" at 23.3,44.7 h0.75 r300
  text "PA07" at 23.3,42.1 h0.75 r300
  text "PA08" at 23.3,39.6 h0.75 r300
  text "PA09" at 23.3,37 h0.75 r300
  text "PA10" at 23.3,34.5 h0.75 r300
  text "PA11" at 23.3,32 h0.75 r300
  text "PB10" at 28.8,22.3 h0.75 r30
  text "PB11" at 31.6,22.3 h0.75 r30
  text "PA12" at 34.3,22.3 h0.75 r30
  text "PA13" at 36.8,22.3 h0.75 r30
  text "PA14" at 39.3,22.3 h0.75 r30
  text "PA15" at 41.9,22.3 h0.75 r30
  text "PA16" at 44.4,22.3 h0.75 r30
  text "PA17" at 47,22.3 h0.75 r30
  text "PA18" at 49.5,22.3 h0.75 r30
  text "PA19" at 52.1,22.3 h0.75 r30
  text "PA20" at 54.6,22.3 h0.75 r30
  text "PA21" at 57.1,22.3 h0.75 r30
Bottom Solder:
  text "Kowin Shi" at 57.9,30.9 h1.52
  text "MiniSAMD21G18" at 57.9,28.6 h1.52
Mechanical 29:
  the board outline again, w0.254

## Dimensions
23,22 to 62.5,22 on Mechanical 16
23,67 to 23,22 on Mechanical 16

## Text inside footprints (layer, text, board x,y; h text height)
HDR2: Top Overlay "VTref" at 37.2,57 h0.75; Top Overlay "GND" at 37.2,55.7 h0.75; Top Overlay "GND2" at 37.2,54.4 h0.75; Top Overlay "NC" at 37.2,53.2 h0.75; Top Overlay "NC" at 37.2,51.9 h0.75; Top Overlay "nRESET" at 49.3,51.9 h0.75; Top Overlay "TDI" at 49.3,53.2 h0.75; Top Overlay "SWO" at 49.3,54.4 h0.75; Top Overlay "SWCLK" at 49.3,55.7 h0.75; Top Overlay "SWDIO" at 49.3,57 h0.75
U1: Top Overlay "1" at 37.726,39.023 h1